# EAGLE board ES_Datalogger_R0 (EAGLE 8.6.0)
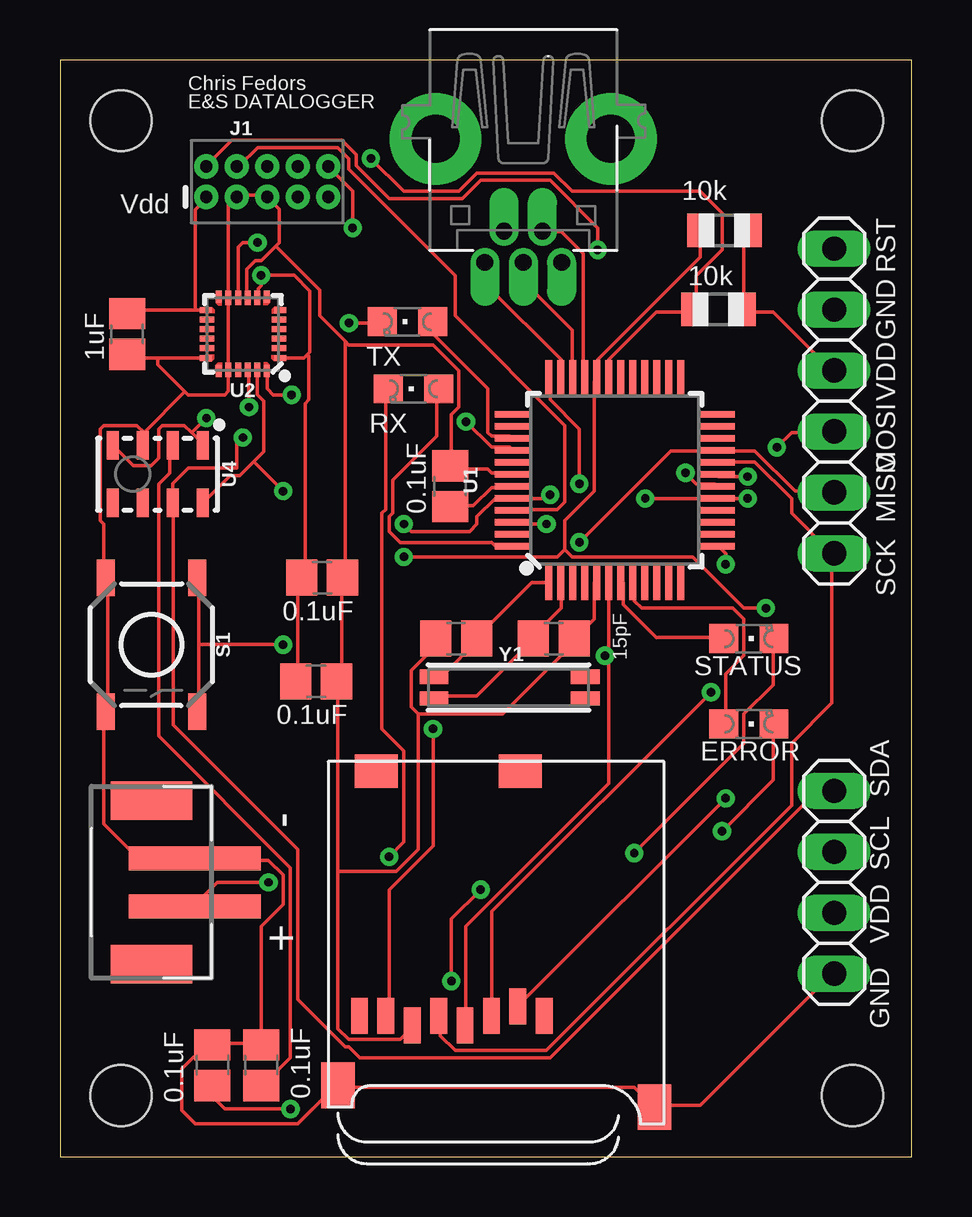
[diagram p0: board, top side]
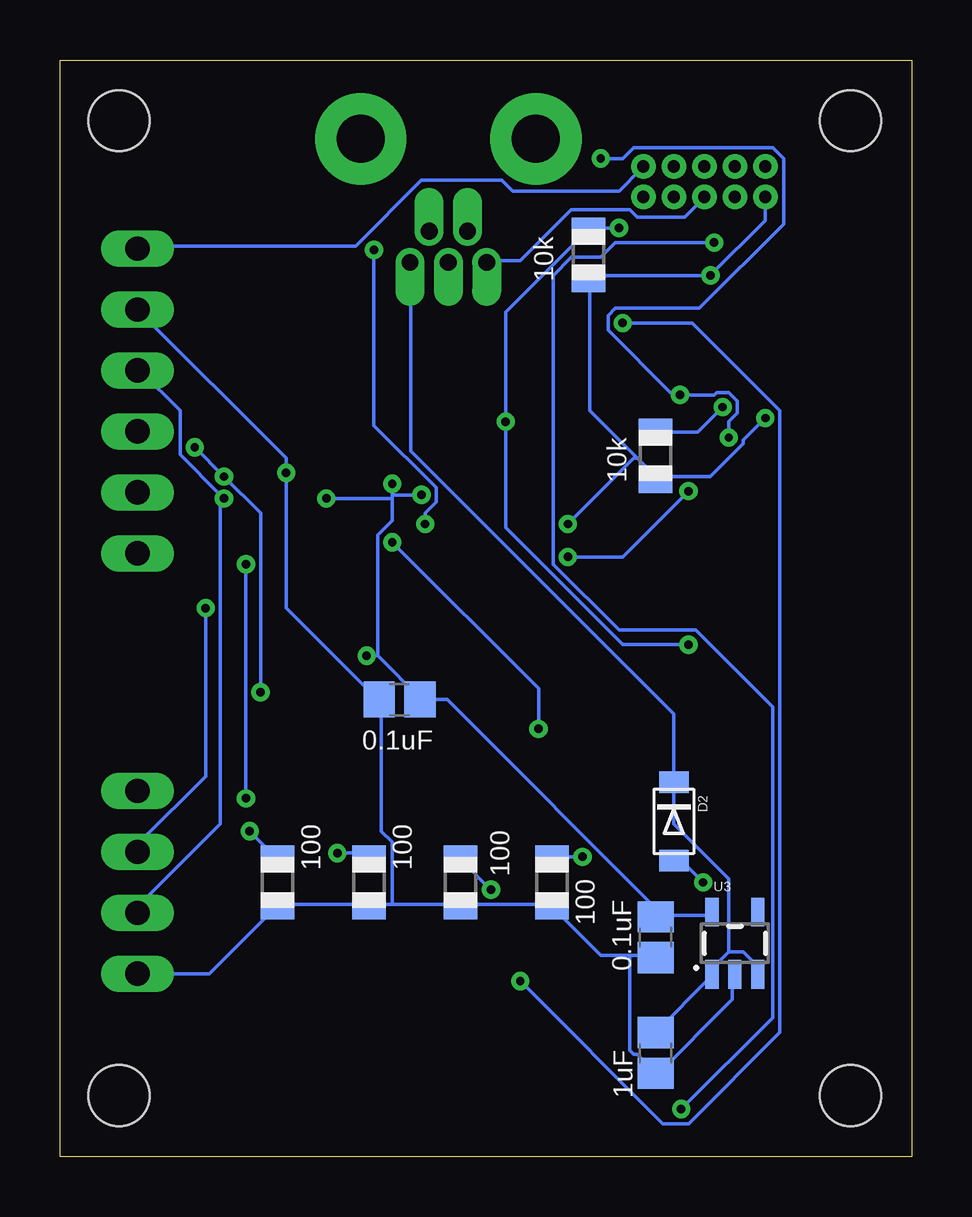
[diagram p1: board, bottom side, seen from below]

Size 35.48 x 45.71 mm. Coordinates in mm from the lower left corner, seen from the top.
Outline: 0,0 35.48,0 35.48,45.71 0,45.71 0,0
Copper layers (1*16): Top 0.035mm / dielectric 1.5mm / Bottom 0.035mm
Design rules "default": minimum track width 6mil, minimum drill 0.35mm, track to track 6mil, track to pad 6mil, pad to pad 6mil, via to via 6mil, smd to smd 6mil, copper to edge 40mil, drill to drill 6mil, minimum pad ring 10mil, minimum via ring 8mil, stop-mask expansion 4mil, vias tented up to drill 0mil, thermal gap 10mil
Holes 2.54 mm at 33.02,43.18 2.54,43.18 2.54,2.54 33.02,2.54

## Footprints (pad centres in the part's own frame; a part is rotated, then mirrored left to right if it is on the bottom)
C0805 = smd 1.3 x 1.5: 1 -0.85,0; 2 0.85,0
JST-PH-2-SMT = smd 1 x 5.5: 1 -1,-1.8; 2 1,-1.8 | smd 1.6 x 3.4: NC1 -3.4,0; NC2 3.4,0
USB-MINIB-THM-MOLEX = drill 0.7 offset: D+ 0,9.72; D- -0.8,8.42; GND 1.6,9.72; ID 0.8,8.42; VBUS -1.6,9.72 | drill 2 pad 3.81: GND1 -3.65,4.57; GND4 3.65,4.57
SOD-123FL = smd 0.91 x 1.22: A 1.637,0; C -1.637,0
CHIPLED_0805 = smd 1.2 x 1.2: A 0,-1.05; C 0,1.05
2X5-PTH-1.27MM = drill 0.508 pad 1: 1 -2.54,-0.635; 2 -2.54,0.635; 3 -1.27,-0.635; 4 -1.27,0.635; 5 0,-0.635; 6 0,0.635; 7 1.27,-0.635; 8 1.27,0.635; 9 2.54,-0.635; 10 2.54,0.635
1X04 = drill 1.016 long: 1 -3.81,0; 2 -1.27,0; 3 1.27,0; 4 3.81,0
1X06 = drill 1.016 long: 1 -6.35,0; 2 -3.81,0; 3 -1.27,0; 4 1.27,0; 5 3.81,0; 6 6.35,0
R0805 = smd 1.1 x 1.4: 1 -1,0; 2 1,0
TACTILE_SWITCH_SMD_5.2MM = smd 1.524 x 0.762: 1 -2.794,1.905; 2 2.794,1.905; 3 -2.794,-1.905; 4 2.794,-1.905
TQFP-48 = smd 1.5 x 0.28: 1 -4.25,2.75; 2 -4.25,2.25; 3 -4.25,1.75; 4 -4.25,1.25; 5 -4.25,0.75; 6 -4.25,0.25; 7 -4.25,-0.25; 8 -4.25,-0.75; 9 -4.25,-1.25; 10 -4.25,-1.75; 11 -4.25,-2.25; 12 -4.25,-2.75; 25 4.25,-2.75; 26 4.25,-2.25; 27 4.25,-1.75; 28 4.25,-1.25; 29 4.25,-0.75; 30 4.25,-0.25; 31 4.25,0.25; 32 4.25,0.75; 33 4.25,1.25; 34 4.25,1.75; 35 4.25,2.25; 36 4.25,2.75 | smd 0.28 x 1.5: 13 -2.75,-4.25; 14 -2.25,-4.25; 15 -1.75,-4.25; 16 -1.25,-4.25; 17 -0.75,-4.25; 18 -0.25,-4.25; 19 0.25,-4.25; 20 0.75,-4.25; 21 1.25,-4.25; 22 1.75,-4.25; 23 2.25,-4.25; 24 2.75,-4.25; 37 2.75,4.25; 38 2.25,4.25; 39 1.75,4.25; 40 1.25,4.25; 41 0.75,4.25; 42 0.25,4.25; 43 -0.25,4.25; 44 -0.75,4.25; 45 -1.25,4.25; 46 -1.75,4.25; 47 -2.25,4.25; 48 -2.75,4.25
QFN24-3X3 = smd 0.495 x 0.25: 1 -1.552,1; 6 -1.552,-1; 13 1.552,-1; 18 1.552,1 | smd 0.6 x 0.25: 2 -1.5,0.6; 3 -1.5,0.2; 4 -1.5,-0.2; 5 -1.5,-0.6; 14 1.5,-0.6; 15 1.5,-0.2; 16 1.5,0.2; 17 1.5,0.6 | smd 0.25 x 0.495: 7 -1,-1.552; 12 1,-1.552; 19 1,1.552; 24 -1,1.552 | smd 0.25 x 0.6: 8 -0.6,-1.5; 9 -0.2,-1.5; 10 0.2,-1.5; 11 0.6,-1.5; 20 0.6,1.5; 21 0.2,1.5; 22 -0.2,1.5; 23 -0.6,1.5
SOT23-5 = smd 0.55 x 1.2: 1 -0.95,-1.3; 2 0,-1.3; 3 0.95,-1.3; 4 0.95,1.3; 5 -0.95,1.3
LGA-8-5X3 = smd 1.2 x 0.5: 1 -1.2,1.875; 2 -1.2,0.625; 3 -1.2,-0.625; 4 -1.2,-1.875; 5 1.2,-1.875; 6 1.2,-0.625; 7 1.2,0.625; 8 1.2,1.875
MICROSD = smd 0.7 x 1.5: 1 9,-10.64; 2 7.9,-10.24; 3 6.8,-10.64; 4 5.7,-11.04; 5 4.6,-10.64; 6 3.5,-11.04; 7 2.4,-10.64; 8 1.3,-10.64 | smd 1.8 x 1.4: CD1 2,-0.44; CD2 8,-0.44 | smd 1.4 x 1.9: MT1 0.4,-13.54; MT2 13.6,-14.44
CRYSTAL-SMD-MC-146 = smd 1.2 x 0.6: NC1 6.9,1.2; NC2 6.9,0.3; P$1 0.6,0.3; P$2 0.6,1.2

## Placement (x,y rotation side)
C1  0.1uF  [C0805]  16.26,27.94 90 top
C2  15pF  [C0805]  20.57,21.59 0 top
C3  15pF  [C0805]  16.51,21.59 180 top
C4  0.1uF  [C0805]  10.67,19.81 0 top
C5  0.1uF  [C0805]  21.34,19.05 180 bottom
C6  0.1uF  [C0805]  10.67,9.14 270 bottom
C7  0.1uF  [C0805]  10.92,24.13 0 top
C8  0.1uF  [C0805]  6.35,3.81 90 top
C9  0.1uF  [C0805]  8.38,3.81 90 top
C10  1uF  [C0805]  10.67,4.32 270 bottom
C11  1uF  [C0805]  2.79,34.29 270 top
CN1  [JST-PH-2-SMT]  3.81,11.43 90 top
CN3  [USB-MINIB-THM-MOLEX]  19.3,46.99 180 top
D2  [SOD-123FL]  9.91,13.97 270 bottom
ERROR  Red  [CHIPLED_0805]  28.7,18.03 270 top
J1  CORTEX_DEBUG_PTH  [2X5-PTH-1.27MM]  8.64,40.64 0 top
JP1  [1X04]  32.26,11.43 90 top
JP3  [1X06]  32.26,31.5 270 top
R1  10k  [R0805]  13.46,37.59 270 bottom
R2  10k  [R0805]  10.67,29.21 270 bottom
R3  10k  [R0805]  27.43,35.31 0 top
R4  100  [R0805]  14.99,11.43 90 bottom
R5  100  [R0805]  18.8,11.43 90 bottom
R6  100  [R0805]  22.61,11.43 90 bottom
R7  100  [R0805]  26.42,11.43 90 bottom
R8  10k  [R0805]  27.69,38.61 0 top
RX  Yellow  [CHIPLED_0805]  14.73,32 90 top
S1  [TACTILE_SWITCH_SMD_5.2MM]  3.81,21.34 270 top
STATUS  Green  [CHIPLED_0805]  28.7,21.59 270 top
TX  Yellow  [CHIPLED_0805]  14.48,34.8 90 top
U1  ATSAMD21G-A  [TQFP-48]  23.11,28.19 90 top
U2  9DoF IMU  [QFN24-3X3]  7.62,34.29 180 top
U3  3.3V  [SOT23-5]  7.37,8.89 0 bottom
U4  MPL3115A2  [LGA-8-5X3]  4.06,28.45 270 top
U$1  MICROSD  [MICROSD]  11.18,16.51 0 top
Y1  32.768kHz  [CRYSTAL-SMD-MC-146]  14.99,18.8 0 top

## Library data of the parts
C1-C11 CN1 CN3 D2 ERROR R1-R8 RX STATUS TX U$1 = adafruit
J1 = SparkFun-Connectors
JP1 JP3 = pinhead
S1 = SparkFun-Switches; PROD_ID: SWCH-08247; SF_SKU: COM-08720
U1 = SparkFun-IC-Microcontroller; PROD_ID: IC-13064
U2 = SparkFun-Sensors; PROD_ID: IC-13192
U3 = SparkFun-IC-Power; PROD_ID: VREG-12457
U4 = SparkFun-Sensors; PROD_ID: IC-10869
Y1 = SparkFun-Clocks; PROD_ID: XTAL-09342

## Nets
GND: C1.2 C2.2 C3.2 C4.2 C5.2 C6.2 C7.2 C8.2 C9.2 C10.2 C11.2 CN1.2 CN3.GND J1.3 J1.5 JP1.1 JP3.2 R4.1 R5.1 R6.1 R7.1 S1.3 S1.4 U1.5 U1.18 U1.35 U1.42 U2.9 U2.11 U2.18 U2.20 U3.2 U4.3 U$1.6 U$1.MT1 U$1.MT2
GREEN_LED: STATUS.A U1.7
MISO: JP3.5 U1.21 U$1.7
MOSI: JP3.4 U1.19 U$1.3
N$1: C1.1 U1.43
N$2: C2.1 U1.2 Y1.P$1
N$3: R4.2 RX.C
N$4: C3.1 U1.1 Y1.P$2
N$5: R5.2 TX.C
N$6: R6.2 STATUS.C
N$7: ERROR.C R7.2
N$9: C9.1 U4.2
N$12: R2.1 U2.22
N$13: C8.1 U2.10
RED_LED: ERROR.A U1.8
RX_LED: RX.A U1.48
SCK: JP3.6 U1.20 U$1.5
SCL: JP1.3 R8.1 U1.32 U2.23 U4.8
SD_CS: U1.13 U$1.2
SDA: JP1.4 R3.1 U1.31 U2.24 U4.7
SWCLK: J1.4 U1.45
SWDIO: J1.2 U1.46
TX_LED: TX.A U1.39
USB_D+: CN3.D+ U1.34
USB_D-: CN3.D- U1.33
V_BAT: CN1.1 D2.A
VBUS: C10.1 CN3.VBUS D2.C U3.1 U3.3
VDD: C4.1 C5.1 C6.1 C7.1 C11.1 J1.1 JP1.2 JP3.3 R1.2 R2.2 R3.2 R8.2 U1.6 U1.17 U1.36 U1.44 U2.1 U2.8 U2.13 U3.5 U4.1 U4.4 U$1.4
~RESET: J1.10 JP3.1 R1.1 S1.1 S1.2 U1.40

## Tracks (layer width: path | path; a pad name or v marks a point on that pad's centre or on a via)
GND  (via drill 0.35)
  Top 0.152: U2.18 4.06,33.29 | 4.06,33.29 2.94,33.29 C11.2 | 5.21,31.88 5.33,31.75 6.86,31.75 7.02,31.91 U2.20 7.01,32.92 7.01,35.66 U2.11 7.02,39.66 J1.3 7.47,40.08 8.53,40.08 J1.5 9.14,39.5 9.14,38.1 8.99,37.95 | 5.21,31.88 4.06,33.02 4.06,33.29 | U2.9 7.82,35.88 7.78,35.93 7.78,36.98 8.13,37.34 8.38,37.34 8.99,37.95 | 14.94,18.44 14.63,18.75 14.63,20.27 15.54,21.18 15.54,21.49 C3.2 | 14.94,18.44 18.44,18.44 21.49,21.49 C2.2 21.49,21.64 22.25,22.4 22.25,23.93 U1.5 | 11.58,19.81 11.58,11.89 | 11.58,11.89 11.58,5.33 12.04,4.88 14.17,4.88 14.63,5.33 U$1.6 | 11.58,19.81 11.73,19.96 11.73,24.08 C7.2 11.89,24.23 11.89,33.98 | 11.58,19.81 C4.2 | 14.94,18.44 14.94,12.8 14.02,11.89 11.58,11.89 | 8.38,4.72 5.94,4.72 C8.2 6.11,4.69 | 5.79,4.72 6.11,4.69 | 8.38,4.72 8.38,9.6 9.3,10.52 9.3,11.73 8.69,12.34 5.64,12.34 CN1.2 5.49,12.5 3.2,12.5 1.83,13.87 1.83,18.44 S1.4 1.98,18.59 1.98,24.08 S1.3 1.83,24.23 1.83,26.36 1.68,26.52 1.68,30.33 1.83,30.48 3.2,30.48 3.5,30.18 | 8.38,4.72 C9.2 | 3.5,30.18 3.5,29.72 U4.3 3.5,30.18 | 5.21,31.88 3.5,30.18 | U1.35 20.88,32.46 20.88,33.22 17.83,36.27 17.83,37.19 CN3.GND | U1.42 18.75,28.5 17.98,28.5 17.83,28.65 16.31,28.65 C1.2 16.31,28.8 16.31,30.94 16.61,31.24 16.61,32.77 15.54,33.83 12.04,33.83 11.89,33.98 | 11.89,33.98 10.82,35.05 10.82,36.12 8.99,37.95 | JP1.1 32.16,7.62 26.67,2.13 24.84,2.13 U$1.MT2 24.69,2.13 23.93,2.9 11.58,2.9 U$1.MT1 11.43,2.9 9.91,1.37 5.64,1.37 5.08,1.93 5.08,3.66 6.11,4.69 | v26.06,28.5 26.52,28.04 27.28,28.04 U1.18
  Bottom 0.152: CN3.GND 17.68,37.34 16.31,37.34 14.17,39.47 11.73,39.47 11.43,39.17 9.45,39.17 8.69,39.93 J1.5 | JP3.2 26.06,29.11 v26.06,28.5 26.06,22.86 22.25,19.05 C5.2 22.1,19.05 22.1,13.56 21.64,13.11 21.64,10.52 | U3.2 7.47,7.47 7.47,6.55 10.67,3.35 C10.2 10.67,3.5 11.43,4.27 11.58,4.27 11.73,4.42 11.73,8.38 | 21.64,10.52 18.9,10.52 R5.1 18.75,10.52 15.09,10.52 R4.1 14.94,10.36 12.95,8.38 11.73,8.38 | 21.64,10.52 22.55,10.52 R6.1 22.71,10.52 26.36,10.52 R7.1 26.52,10.36 29.26,7.62 JP1.1 | 11.73,8.38 10.67,8.38 C6.2
GREEN_LED
  Top 0.152: STATUS.A 27.58,21.64 24.84,21.64 23.47,23.01 23.47,23.93 U1.7
MISO  (via drill 0.35)
  Top 0.152: v15.54,17.83 15.54,12.95 13.72,11.12 13.72,5.94 U$1.7 | v21.64,25.6 25.45,29.41 27.28,29.41 U1.21 27.43,29.41 28.96,29.41 30.63,27.74 32.16,27.74 JP3.5
  Bottom 0.152: v15.54,17.83 15.54,19.51 v21.64,25.6
MOSI  (via drill 0.35)
  Top 0.152: v27.13,19.36 17.98,10.21 17.98,5.94 U$1.3 | v28.65,28.35 27.43,28.35 U1.19 | v29.87,29.57 30.48,30.18 32.16,30.18 JP3.4
  Bottom 0.152: v27.13,19.36 27.13,26.82 v28.65,28.35 v29.87,29.57
N$1
  Top 0.152: C1.1 16.31,27.13 17.22,27.13 17.98,27.89 18.75,27.89 U1.43
N$2
  Top 0.152: Y1.P$1 15.7,19.2 17.37,19.2 19.66,21.49 C2.1 19.66,21.64 20.88,22.86 20.88,23.93 U1.2
N$3  (via drill 0.35)
  Top 0.152: v13.72,12.5 14.33,13.11 14.33,16.92 13.41,17.83 13.41,26.82 13.56,26.98 13.56,32 RX.C
  Bottom 0.152: v13.72,12.5 14.94,12.5 R4.2
N$4
  Top 0.152: Y1.P$2 15.7,20.12 16,20.12 17.37,21.49 C3.1 17.37,21.64 19.66,23.93 20.27,23.93 U1.1
N$5  (via drill 0.35)
  Top 0.152: v12.04,34.75 13.41,34.75 TX.C | v16.31,7.32 16.31,9.91 v17.53,11.12
  Bottom 0.152: v12.04,34.75 9.14,34.75 5.49,31.09 5.49,5.18 9.3,1.37 10.36,1.37 v16.31,7.32 | v17.53,11.12 18.75,12.34 R5.2
N$6  (via drill 0.35)
  Top 0.152: v23.93,12.65 28.5,17.22 28.5,18.44 29.72,19.66 29.72,21.49 STATUS.C
  Bottom 0.152: v23.93,12.65 22.86,12.65 22.71,12.5 R6.2
N$7  (via drill 0.35)
  Top 0.152: v27.58,13.56 29.72,15.7 29.72,17.98 ERROR.C
  Bottom 0.152: v27.58,13.56 26.52,12.5 R7.2
N$9
  Top 0.152: U4.2 4.57,29.57 4.57,28.5 4.12,28.04 4.12,17.53 9.6,12.04 9.6,4.12 8.38,2.9 C9.1
N$12  (via drill 0.35)
  Top 0.152: U2.22 7.87,32.74 7.87,32.4 7.87,32.39 v7.87,31.24
  Bottom 0.152: v7.87,31.24 8.91,30.21 R2.1
N$13  (via drill 0.35)
  Top 0.152: U2.10 7.42,37.9 7.62,38.1 v8.23,38.1 | v9.6,1.98 6.86,1.98 5.94,2.9 C8.1
  Bottom 0.152: v8.23,38.1 12.34,38.1 12.95,37.49 14.17,37.49 14.94,36.73 14.94,24.69 12.19,21.95 8.99,21.95 5.79,18.75 5.79,5.79 v9.6,1.98
RED_LED
  Top 0.152: ERROR.A 27.74,18.14 27.74,20.12 28.5,20.88 28.5,22.4 28.04,22.86 24.23,22.86 23.93,23.16 23.93,23.93 U1.8
RX_LED
  Top 0.152: RX.A 15.7,32 15.7,30.02 13.87,28.19 13.87,26.82 13.72,26.67 13.72,26.06 14.17,25.6 17.98,25.6 18.14,25.45 18.75,25.45 U1.48
SCK
  Top 0.152: 32.16,25.15 32.16,18.9 30.48,17.22 30.48,14.63 20.27,4.42 16.46,4.42 15.85,5.03 15.85,5.79 U$1.5 | 32.16,25.15 30.48,26.82 30.48,27.43 28.96,28.96 27.43,28.96 U1.20 | 32.16,25.15 JP3.6
SCL  (via drill 0.35)
  Top 0.152: U2.23 8.22,31.75 8.48,31.49 8.48,29.39 8.06,28.97 | U4.8 7.09,28.4 7.49,28.4 8.06,28.97 | R8.1 26.67,38.56 26.67,37.49 22.4,33.22 22.4,32.46 U1.32 22.25,32.31 22.25,27.74 21.03,26.52 21.03,25.3 | v29.41,22.86 28.5,22.86 26.36,24.99 21.34,24.99 21.03,25.3 | v9.3,27.74 8.06,28.97 | v14.33,24.99 20.73,24.99 21.03,25.3
  Bottom 0.152: v29.41,22.86 29.41,15.85 32.16,13.11 32.16,12.8 JP1.3 | v9.3,27.74 12.04,24.99 v14.33,24.99
SD_CS  (via drill 0.35)
  Top 0.152: v27.74,14.94 19.2,6.4 U$1.2 | v27.74,24.69 27.74,25.15 27.43,25.45 U1.13
  Bottom 0.152: v27.74,24.69 v27.74,14.94
SDA  (via drill 0.35)
  Top 0.152: U2.24 8.64,32.72 8.64,32 8.89,31.75 v9.65,31.75 | v7.62,29.97 7.37,29.72 7.37,28.7 5.33,28.7 4.69,28.06 U4.7 4.72,27.13 4.72,17.98 9.91,12.8 9.91,6.55 11.89,4.57 12.04,4.57 12.5,4.12 20.42,4.12 31.55,15.24 JP1.4 | U1.31 22.86,32.46 22.86,33.22 24.84,35.2 26.36,35.2 R3.1 26.52,35.36 26.52,36.73 27.58,37.8 27.58,39.32 26.67,40.23 21.34,40.23 20.57,41 17.37,41 16.61,40.23 14.33,40.23 v12.95,41.6
  Bottom 0.152: v7.62,29.97 7.62,30.64 7.27,30.99 7.27,31.49 7.62,31.85 8.12,31.85 8.22,31.75 v9.65,31.75 9.75,31.85 10.06,31.85 12.65,34.44 12.65,35.05 12.34,35.36 8.84,35.36 5.33,38.86 5.33,41.6 5.79,42.06 11.58,42.06 12.04,41.6 v12.95,41.6
SWCLK
  Top 0.152: U1.45 18.9,26.98 20.73,26.98 21.03,27.28 21.03,30.48 16.46,35.05 16.46,36.73 12.04,41.15 12.04,41.6 11.58,42.06 8.23,42.06 7.47,41.3 J1.4
SWDIO  (via drill 0.35)
  Top 0.152: v20.27,26.36 18.9,26.36 U1.46 | v22.4,37.8 22.4,38.71 20.42,40.69 17.53,40.69 16.76,39.93 13.72,39.93 12.34,41.3 12.34,41.76 11.73,42.37 7.16,42.37 6.1,41.3 J1.2
  Bottom 0.152: v20.27,26.36 20.27,26.82 19.81,27.28 19.81,27.89 22.4,30.48 v22.4,37.8
TX_LED
  Top 0.152: TX.A 15.54,34.75 15.54,34.29 17.83,32 17.83,30.18 17.98,30.02 18.75,30.02 U1.39
USB_D+
  Top 0.152: U1.34 21.34,32.46 21.34,34.44 19.36,36.42 19.36,37.19 CN3.D+
USB_D-
  Top 0.152: U1.33 21.79,32.46 21.79,37.64 20.88,38.56 20.12,38.56 CN3.D-
V_BAT  (via drill 0.35)
  Top 0.152: v8.69,11.43 6.55,11.43 5.64,10.52 CN1.1
  Bottom 0.152: v8.69,11.43 9.45,12.19 9.91,12.19 D2.A
VBUS
  Bottom 0.152: 7.62,8.53 7.01,8.53 6.55,8.08 6.55,7.62 U3.3 | 7.62,8.53 8.23,7.92 8.23,7.62 U3.1 8.38,7.47 10.67,5.18 C10.1 | 7.62,8.53 7.62,11.58 9.91,13.87 D2.C 9.91,18.44 20.88,29.41 20.88,37.19 CN3.VBUS
VDD  (via drill 0.35)
  Top 0.152: U2.13 5.64,35.29 | 5.64,35.29 2.94,35.29 C11.1 | U2.8 8.27,35.84 8.27,36.18 8.38,36.3 v8.38,36.73 9.75,36.73 10.41,36.07 10.41,33.53 10.31,33.43 | U2.1 10.14,33.29 10.16,33.27 10.31,33.43 | C4.1 9.91,19.81 9.91,23.93 10.06,24.08 C7.1 10.21,24.23 10.21,31.39 10.36,31.55 10.36,33.38 10.31,33.43 | 5.49,30.18 5.94,29.72 U4.1 | 5.49,30.18 5.18,30.48 4.27,30.48 4.12,30.33 4.12,29.11 3.81,28.8 3.05,28.8 2.29,29.57 U4.4 | 5.64,35.29 5.64,39.47 6.1,39.93 J1.1 | v14.33,26.36 14.63,26.06 17.07,26.06 17.37,26.36 17.37,26.67 18.14,27.43 18.75,27.43 U1.44 18.9,27.43 20.27,27.43 v20.42,27.58 | v6.1,30.79 5.49,30.18 | R8.2 28.65,38.56 28.5,38.41 28.5,35.36 R3.2 28.5,35.2 29.72,35.2 32.16,32.77 JP3.3 | 22.86,20.88 22.86,23.93 U1.6 | 22.86,20.88 22.86,15.54 16.92,9.6 16.92,5.49 U$1.4 | v21.64,28.04 21.64,30.33 20.42,31.55 20.42,32.31 U1.36 | v24.38,27.43 27.28,27.43 U1.17 27.43,27.43 v28.65,27.43 | v22.71,20.88 22.86,20.88
  Bottom 0.152: J1.1 6.1,39.02 v8.38,36.73 13.41,36.73 R1.2 13.41,36.58 13.41,31.09 11.43,29.11 | 11.43,29.11 10.67,28.35 | v14.33,26.36 11.58,29.11 11.43,29.11 | v6.1,30.79 7.01,29.87 7.01,29.72 8.38,28.35 10.67,28.35 | 10.67,28.35 R2.2 | 28.8,27.43 28.8,27.58 30.48,29.26 30.48,31.09 32.16,32.77 JP3.3 | 28.8,27.43 28.8,13.87 32.16,10.52 32.16,10.21 JP1.2 | 10.36,10.06 10.67,10.06 C6.1 10.36,10.06 | 10.36,10.06 8.38,10.06 U3.5 | 20.42,19.05 19.36,19.05 10.36,10.06 | 21.64,27.43 21.64,26.52 22.25,25.91 22.25,20.88 | 21.64,27.43 21.64,27.58 | 21.64,27.58 v21.64,28.04 | 20.42,19.05 22.25,20.88 | 20.42,19.05 C5.1 | 21.64,27.43 v24.38,27.43 | 22.25,20.88 v22.71,20.88 | v28.65,27.43 28.8,27.43 | 21.64,27.58 v20.42,27.58
~RESET  (via drill 0.35)
  Top 0.152: 5.79,21.34 5.79,24.08 S1.1 | 5.79,21.34 5.79,18.59 S1.2 | v12.19,38.71 12.19,40.23 11.28,41.15 J1.10 | v16.92,30.63 17.98,29.57 18.75,29.57 U1.40 | v9.3,21.34 5.79,21.34
  Bottom 0.152: v12.19,38.71 13.41,38.71 R1.1 13.56,38.56 16.92,35.2 v16.92,30.63 16.92,26.21 12.04,21.34 v9.3,21.34 | JP3.1 32.16,37.95 23.16,37.95 20.42,40.69 17.07,40.69 16.61,40.23 12.19,40.23 11.28,41.15 J1.10

## Text on the board
tNames: Chris Fedors | E&S DATALOGGER | Vdd | RST | GND | VDD | MOSI | MISO | SCK | SDA | SCL | VDD | GND